# EAGLE board USB_Pickup (EAGLE 5.11)
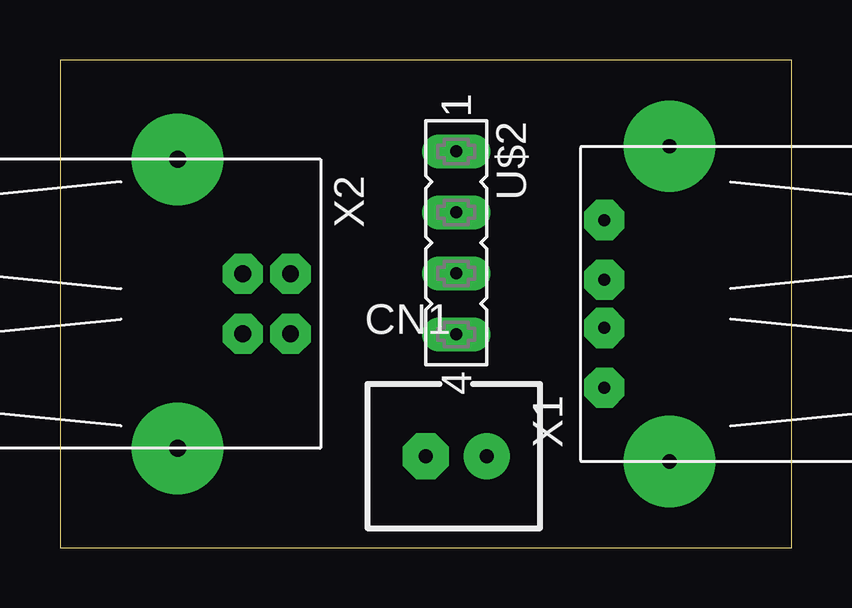
[diagram p0: board, top side]
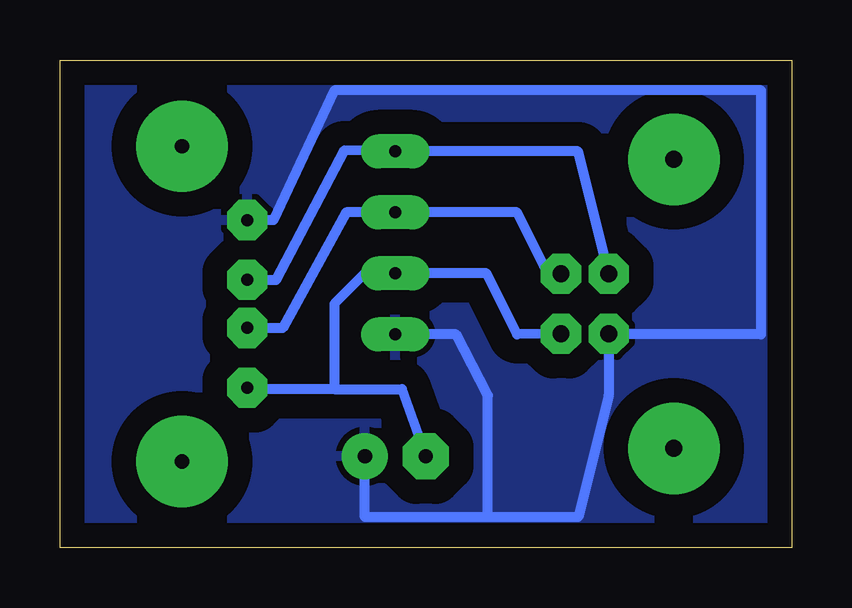
[diagram p1: board, bottom side, seen from below]

Size 30.48 x 20.32 mm. Coordinates in mm from the lower left corner, seen from the top.
Outline: 0,0 30.48,0 30.48,20.32 0,20.32 0,0
Copper layers (1*16): Top 0.035mm / dielectric 1.5mm / Bottom 0.035mm
Design rules "default": minimum track width 10mil, minimum drill 24mil, track to track 8mil, track to pad 8mil, pad to pad 8mil, via to via 8mil, smd to smd 8mil, copper to edge 40mil, drill to drill 8mil, minimum pad ring 10mil, minimum via ring 8mil, stop-mask expansion 4mil, vias tented up to drill 0mil, thermal gap 10mil

## Footprints (pad centres in the part's own frame; a part is rotated, then mirrored left to right if it is on the bottom)
CON_HRS_DIP_2 = drill 0.6 pad 1.93 octagon: 1 -1.27,0 | drill 0.6 pad 1.93 round: 2 1.27,0
CON-S4-1 = drill 0.5 pad 1.422 long: 1 -3.81,0; 2 -1.27,0; 3 1.27,0; 4 3.81,0
USB-A-H = drill 0.5 pad 1.676 octagon: D+ 2.718,-1.003; D- 2.718,1.003; GND 2.718,-3.493; VBUS 2.718,3.493 | drill 0.6 pad 3.81 round: P$5 0,-6.566; P$6 0,6.566
USB-B-H = drill 0.7 pad 1.676 octagon: D+ 0,1.25; D- 1.981,1.25; GND 0,-1.25; VBUS 1.981,-1.25 | drill 0.7 pad 3.81 round: P$1 -2.718,-6.02; P$2 -2.718,6.02

## Placement (x,y rotation side)
CN1  [CON_HRS_DIP_2]  16.51,3.81 0 top
U$2  CON-S4-1  [CON-S4-1]  16.51,12.7 270 top
X1  [USB-A-H]  25.4,10.16 180 top
X2  [USB-B-H]  7.62,10.16 0 top

## Library data of the parts
CN1 = MyLib
U$2 = bant
X1 X2 = con-usb

## Nets
GND: CN1.2 U$2.4 X1.GND X2.GND
N$1: U$2.1 X1.D+ X2.D+
N$2: U$2.2 X1.D- X2.D-
VCC: CN1.1 U$2.3 X1.VBUS X2.VBUS

## Tracks (layer width: path | path; a pad name or v marks a point on that pad's centre or on a via)
GND
  Bottom 0.406: 12.66,1.27 8.89,1.27 7.62,6.35 X2.GND 7.62,8.89 1.27,8.89 1.27,19.05 19.05,19.05 21.59,13.65 X1.GND | 12.66,1.27 17.78,1.27 CN1.2 | U$2.4 13.97,8.89 12.66,6.35 12.66,1.27
  pour Bottom (isolate 1.016): 0,20.32 0,0 30.48,0 30.48,20.32
N$1
  Bottom 0.254: X2.D+ 7.62,11.43
  Bottom 0.406: 7.62,11.43 8.89,16.51 U$2.1 18.63,16.56 21.49,11.15 22.58,11.15 X1.D+
N$2
  Bottom 0.406: X2.D- 10.16,11.43 11.43,13.97 U$2.2 18.56,13.97 21.2,9.14 22.66,9.14 X1.D-
VCC
  Bottom 0.406: X2.VBUS 11.43,8.89 12.7,11.43 U$2.3 17.78,11.43 19.05,10.16 19.05,6.6 | X1.VBUS 22.62,6.6 19.05,6.6 | CN1.1 16.24,6.6 19.05,6.6